# Altium PCB HBridge.PcbDoc
Units mil, origin at the board's own origin, x right, y up, seen from the top; angles counter-clockwise.
Board outline 2143 x 2841 mil, 4 copper layers (Top Layer, 12V, GND, Bottom Layer), stack 30.634 mil thick; 50 components, 77 nets, 268 pads, 78 vias.
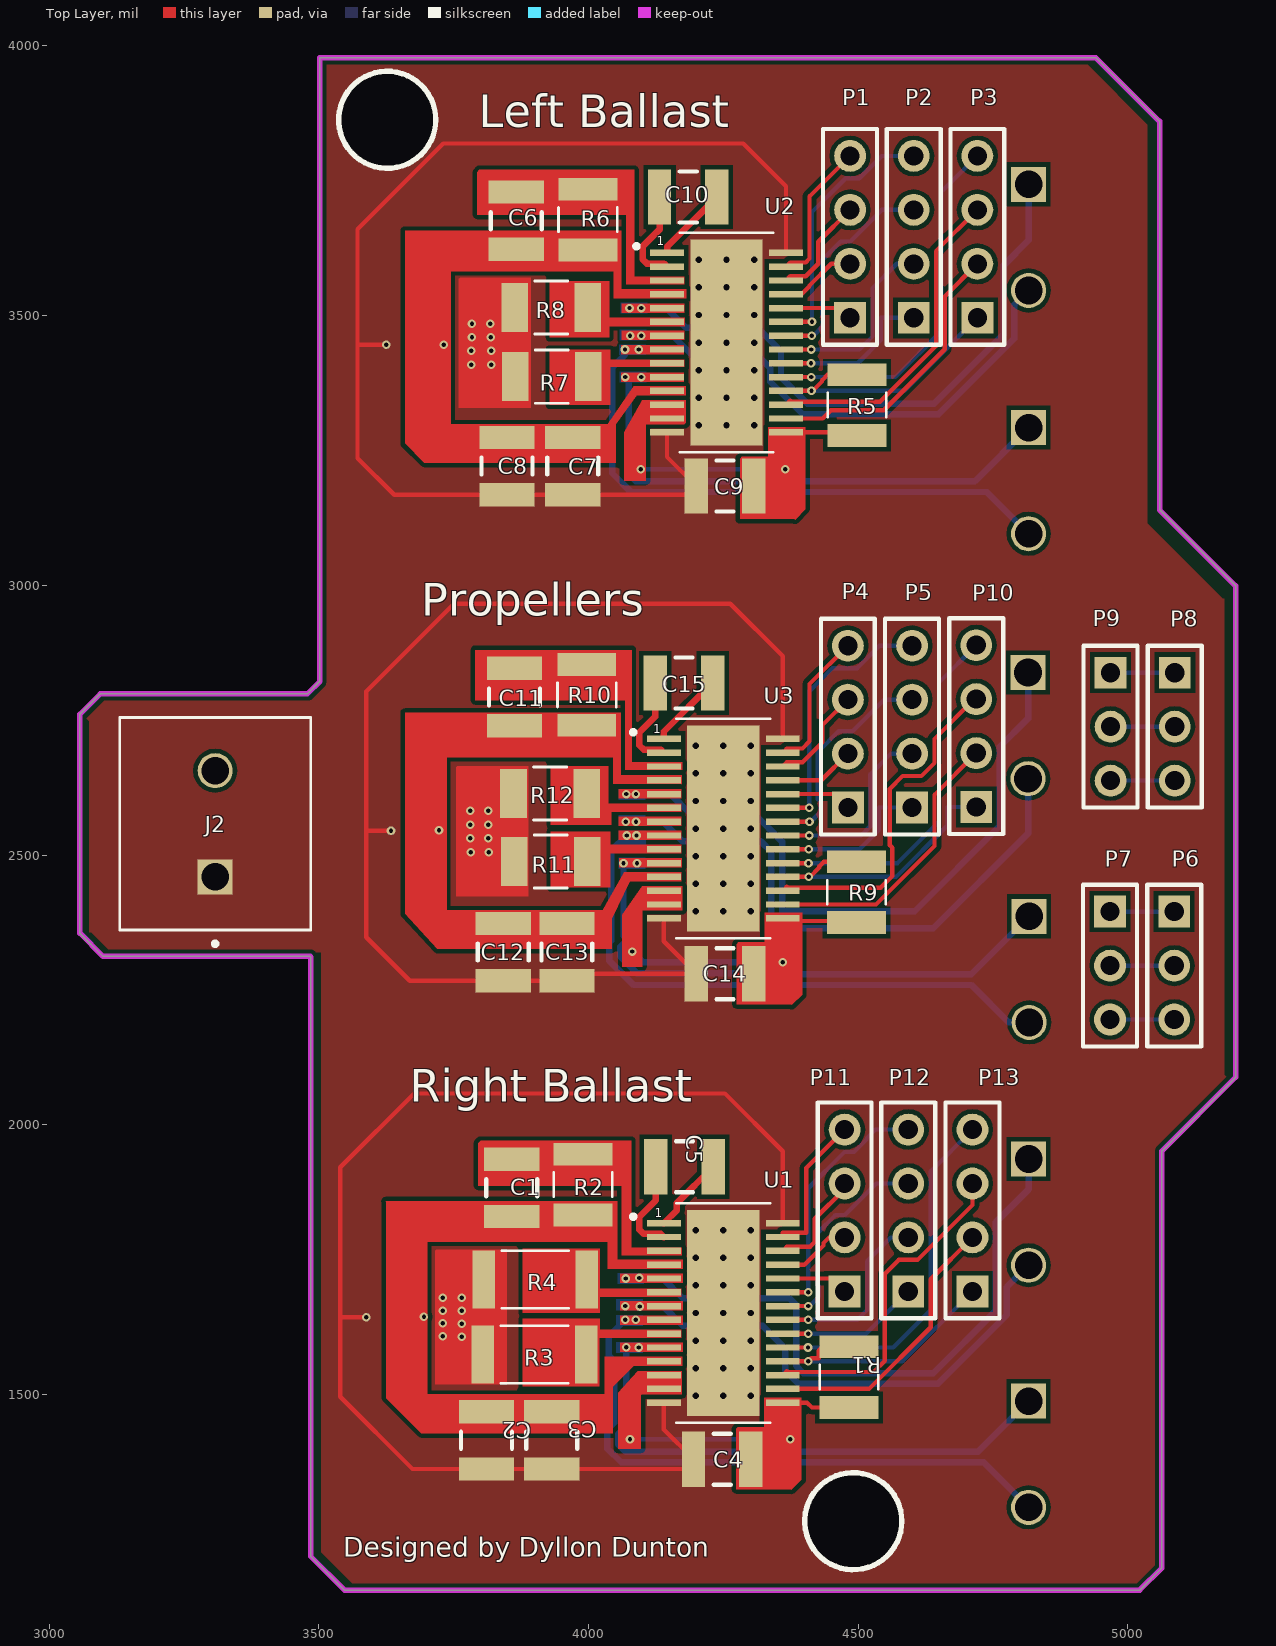
[diagram p0: Top Layer view]
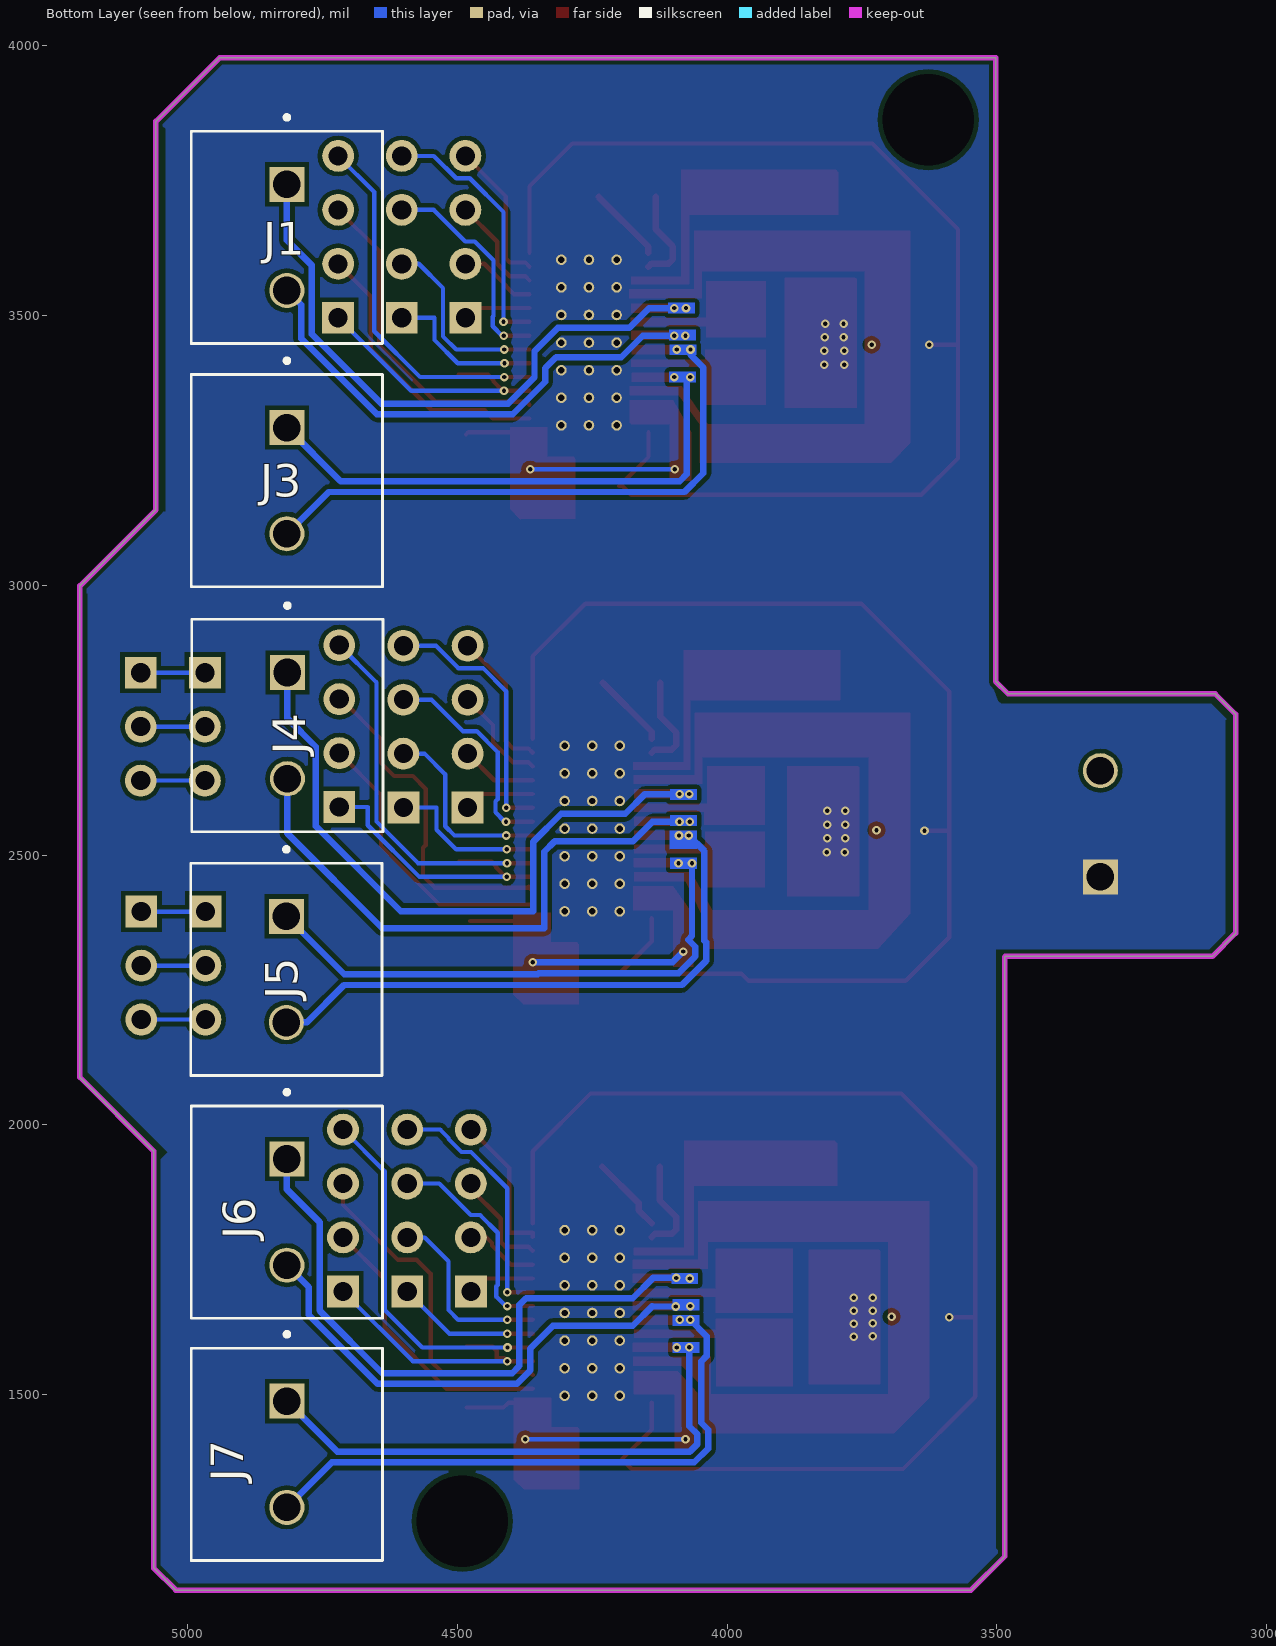
[diagram p1: Bottom Layer view, seen from below]
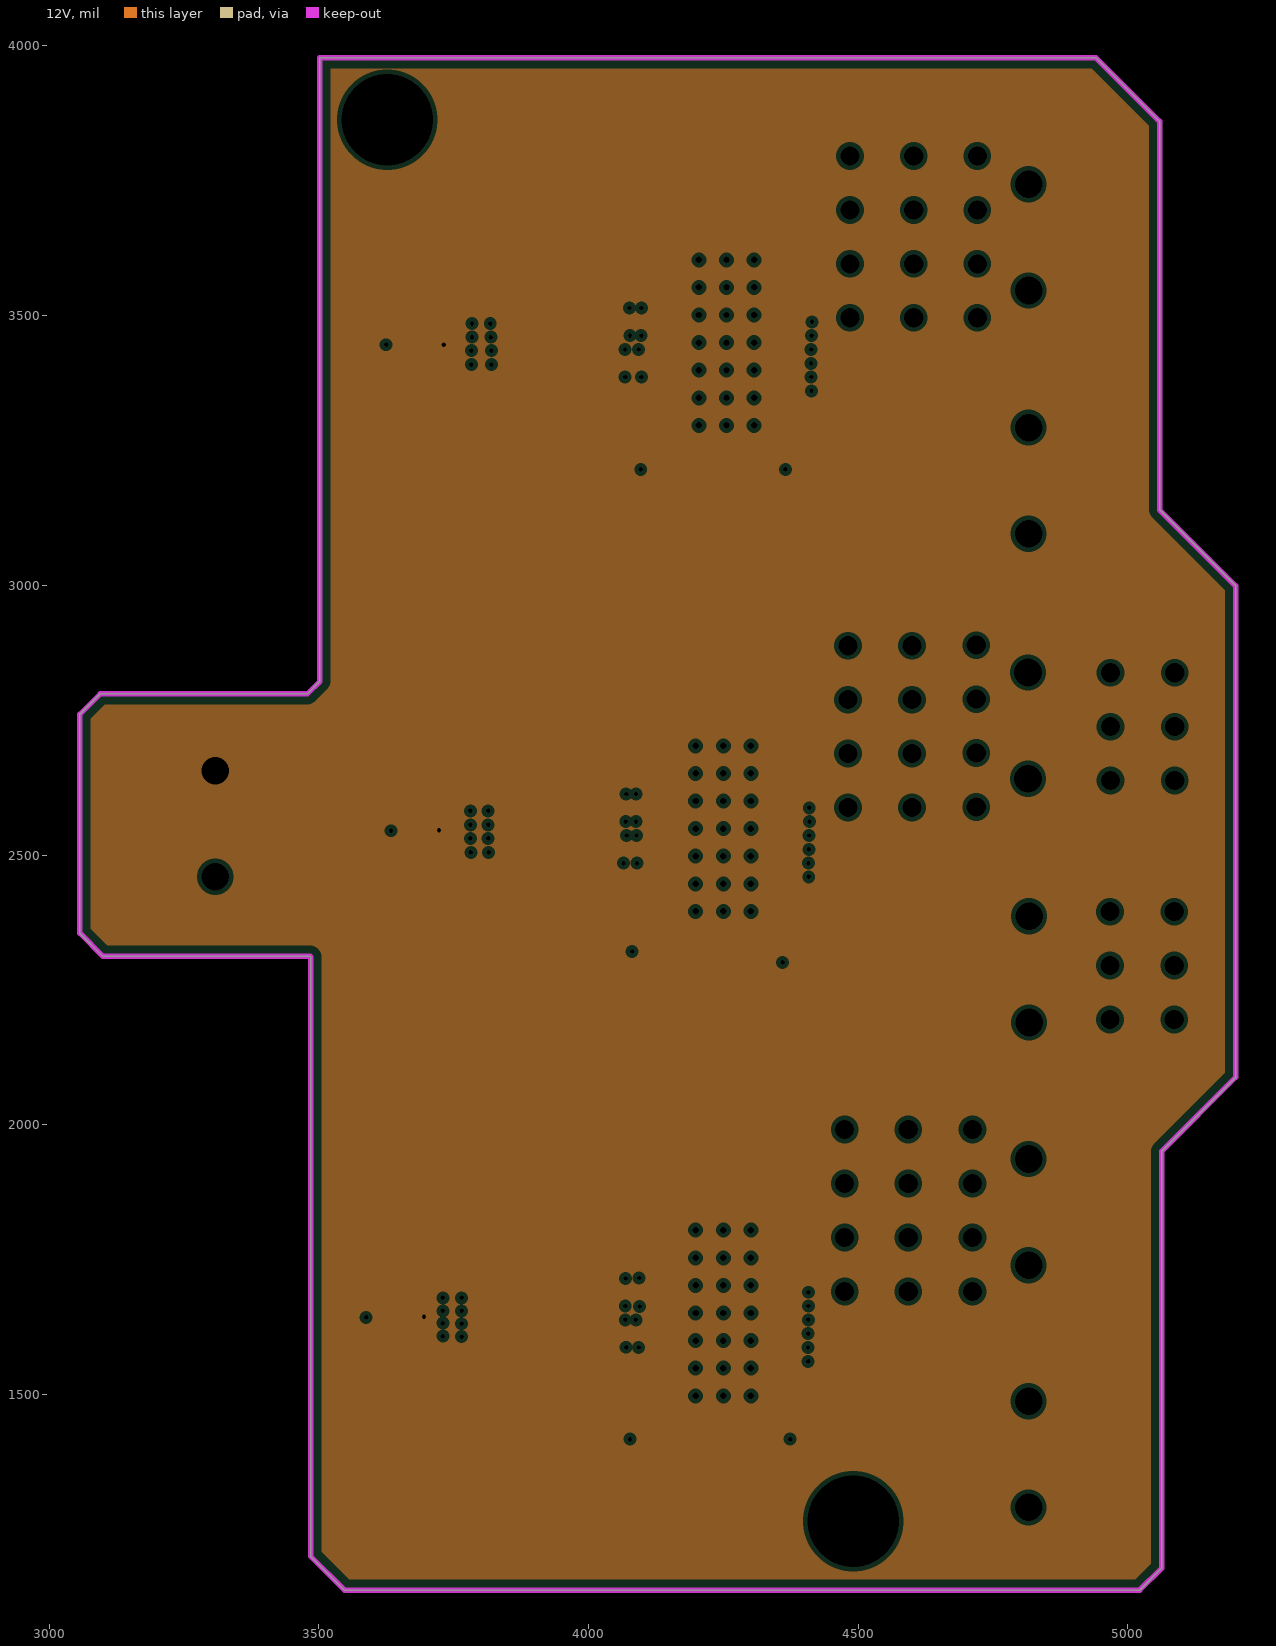
[diagram p2: 12V, clearances drawn from the general rule]
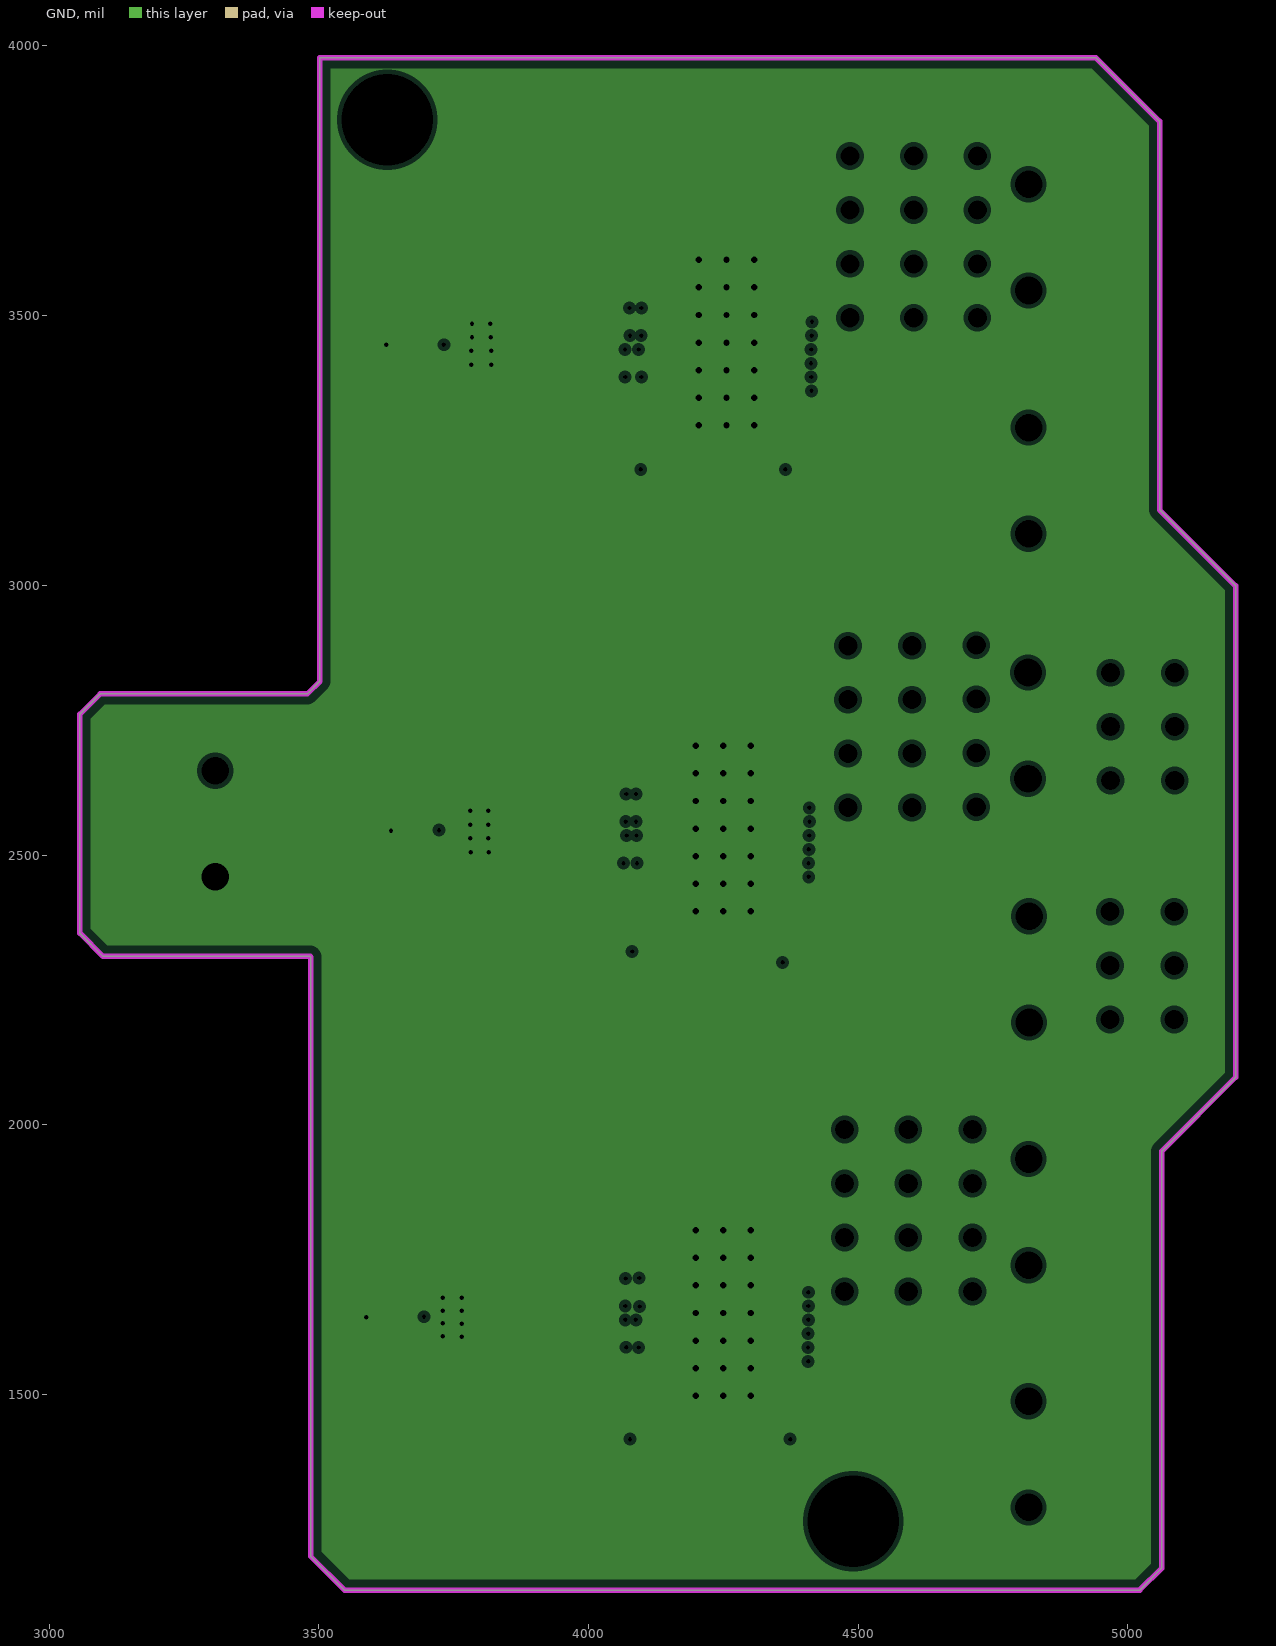
[diagram p3: GND, clearances drawn from the general rule]

## Layer stack, top to bottom
Top Solder: solder mask 0.4, Solder Resist, Dk 3.5
Top Layer: signal copper 1.4
Dielectric 1: core 10, FR-4, Dk 4.2
12V: plane copper 1.417
Dielectric 3: prepreg 5, Dk 4.2
GND: plane copper 1.417
Dielectric 2: core 10, Dk 4.2
Bottom Layer: signal copper 1.4
Bottom Solder: solder mask 0.4, Solder Resist, Dk 3.5

## Board outline
3485,1200 3548,1137 5022,1137 5063,1178 5063,1951 5200,2088 5200,2999 5059,3140 5059,3860 4941,3978 3502,3978 3502,2822 3479,2799 3095,2799 3057,2761 3057,2355 3100,2312 3484,2312 3485,2311

## Design rules (kind name [scope] priority, off if disabled: settings)
Clearance [All] p1: gap=8
HoleSize [All] p1: absolutevalues=TRUE maxlimit=170 minlimit=1 maxpercent=80.000 minpercent=20.000
MinimumSolderMaskSliver [All] p1 off: minsoldermaskwidth=10
PlaneClearance [All] p1: clearance=8
PlaneConnect [All] p1: planeconnectstyle=Direct reliefexpansion=20 reliefentries=4 reliefconductorwidth=10 reliefairgap=10
PolygonConnect [All] p1: connectstyle=Direct reliefconductorwidth=10 reliefentries=4 polygonreliefangle="90 Angle" airgapwidth=10
RoutingVias [All] p1: holewidth=8 width=16 viastyle="Through Hole" minholewidth=8 minwidth=16 maxholewidth=8 maxwidth=16
SilkToBoardRegionClearance [All] p1 off:
SilkToSilkClearance [All] p1 off: silktosilkclearance=10
SilkToSolderMaskClearance [IsPad] p1 off: minsilkscreentomaskgap=10 clearancetoexposedcopper=TRUE
SolderMaskExpansion [All] p1: expansion=4
Width [All] p1: maxlimit=12 minlimit=8 preferedwidth=12
23 further rules are at their usual default settings.

## Classes and differential pairs
component class "Dual H-Bridge Stepper Right": C11 C12 C13 C14 C15 R9 R10 R11 R12 U3
component class "Dual H-Bridge Stepper Left": C6 C7 C8 C9 C10 R5 R6 R7 R8 U2
component class "Dual H-Bridge Propeller": C1 C2 C3 C4 C5 R1 R2 R3 R4 U1
component class HBridge: J1 J2 J3 J4 J5 J6 J7 P1 P2 P3 P4 P5 P6 P7 P8 P9 P10 P11 P12 P13

## Components (designator, comment, footprint, x,y, rotation, side; value= is the part's Value field where it differs from the comment)
C1 "Cap" C1210 3858,1883 r270 top
C2 "Cap" C1210 3811,1415 r90 top
C3 "Cap" C1210 3932,1415 r270 top
C4 "Cap" C1210 4248,1380 r0 top
C5 "Cap" C1210 4178,1922 r0 top
C6 "Cap" C1210 3866,3676 r270 top
C7 "Cap" C1210 3971,3221 r90 top
C8 "Cap" C1210 3849,3221 r270 top
C9 "Cap" C1210 4253,3184 r0 top
C10 "Cap" C1210 4185,3720 r0 top
C11 "Cap" C1210 3863,2793 r270 top
C12 "Cap" C1210 3842,2320 r90 top
C13 "Cap" C1210 3960,2320 r270 top
C14 "Cap" C1210 4253,2280 r0 top
C15 "Cap" C1210 4177,2819 r0 top
J1 "StepperLeft A" PHOENIX_1935776 4816,3645 r90 bottom
J2 "Power Input" PHOENIX_1935776 3308,2558 r270 top
J3 "StepperLeft B" PHOENIX_1935776 4816,3194 r90 bottom
J4 "StepperRight A" PHOENIX_1935776 4815,2740 r90 bottom
J5 "StepperRight B" PHOENIX_1935776 4817,2288 r90 bottom
J6 "Prop A" PHOENIX_1935776 4816,1838 r90 bottom
J7 "Prop B" PHOENIX_1935776 4816,1389 r90 bottom
P1 "PWM Left Stepper" HDR1X4 4485,3496 r90 top
P2 "Control Left Stepper" HDR1X4 4603,3496 r90 top
P3 "Setters Left Stepper" HDR1X4 4721,3496 r90 top
P4 "PWM Right Stepper" HDR1X4 4481,2588 r90 top
P5 "Control Right Stepper" HDR1X4 4600,2588 r90 top
P6 "Header 3" HDR1X3 5086,2395 r270 top
P7 "Header 3" HDR1X3 4967,2395 r270 top
P8 "Header 3" HDR1X3 5087,2838 r270 top
P9 "Header 3" HDR1X3 4968,2838 r270 top
P10 "Setters Right Stepper" HDR1X4 4719,2589 r90 top
P11 "PWM Props" HDR1X4 4475,1691 r90 top
P12 "Control Props" HDR1X4 4593,1691 r90 top
P13 "Setters Props" HDR1X4 4712,1691 r90 top
R1 "RC1210FR-07523RL" RESC3126X65N 4483,1532 r90 top
R2 "CRGP1210F1M0" RESC3126X65N 3990,1889 r90 top
R3 "Res1" RESC5025X70N 3900,1574 r0 top
R4 "Res1" RESC5025X70N 3901.41,1713 r0 top
R5 "RC1210FR-07523RL" RESC3126X65N 4498,3334 r90 top
R6 "CRGP1210F1M0" RESC3126X65N 3999,3678 r90 top
R7 "Res1" RES_ERJ14RQJ1R0U 3932.09,3387 r0 top
R8 "Res1" RES_ERJ14RQJ1R0U 3931.09,3515 r0 top
R9 "RC1210FR-07523RL" RESC3126X65N 4497,2431 r90 top
R10 "CRGP1210F1M0" RESC3126X65N 3997,2797 r90 top
R11 "Res1" RES_ERJ14RQJ1R0U 3930,2488 r0 top
R12 "Res1" RES_ERJ14RQJ1R0U 3929,2614 r0 top
U1 "DRV8841PWP" IC_TPS61196PWPRQ1 4250,1651 r0 top
U2 "DRV8841PWP" IC_TPS61196PWPRQ1 4256,3450 r0 top
U3 "DRV8841PWP" IC_TPS61196PWPRQ1 4250,2549 r0 top

## Footprints (in the part's own frame and the unit in brackets; to place one, negate y for a bottom-side part, rotate by r counter-clockwise, add the part's x,y. Pads: shape width x height; smd on the part's side, far side on the other; paste and mask are expansions set on the pad)
C1210 [mm] "Chip Capacitor, Body 3.2x2.5mm, IPC High Density"
  rect 1.1x2.6 smd: 1(-1.35,0) 2(1.35,0)
  silkscreen extent -0.4,-1.2 0.4,1.2, body extent -1.7,-1.35 1.7,1.35, height 1.3
HDR1X3 [mm] "Connector; Header; 3 Position"
  rect 1.5x1.5 hole 0.9: 1(0,0)
  round 1.5 hole 0.9: 2(2.54,0) 3(5.08,0)
  silkscreen extent -1.27,-1.27 6.35,1.27
HDR1X4 [mm] "Connector; Header; 4 Position"
  rect 1.5x1.5 hole 0.9: 1(0,0)
  round 1.5 hole 0.9: 2(2.54,0) 3(5.08,0) 4(7.62,0)
  silkscreen extent -1.27,-1.27 8.89,1.27
IC_TPS61196PWPRQ1 [mm]
  rect 1.6x0.3 smd paste-0.025 mask+0.07: 1(-2.8,4.225) 2(-2.8,3.575) 3(-2.8,2.925) 4(-2.8,2.275) 5(-2.8,1.625) 6(-2.8,0.975) 7(-2.8,0.325) 8(-2.8,-0.325) 9(-2.8,-0.975) 10(-2.8,-1.625) 11(-2.8,-2.275) 12(-2.8,-2.925) 13(-2.8,-3.575) 14(-2.8,-4.225) 15(2.8,-4.225) 16(2.8,-3.575) 17(2.8,-2.925) 18(2.8,-2.275) 19(2.8,-1.625) 20(2.8,-0.975) 21(2.8,-0.325) 22(2.8,0.325) 23(2.8,0.975) 24(2.8,1.625) 25(2.8,2.275) 26(2.8,2.925) 27(2.8,3.575) 28(2.8,4.225)
  rect 3.4x9.7 smd paste-6 mask+0: 29(0,0)
  round 0.5 hole 0.3 mask+0: 30(0,0) 31(0,1.3) 32(0,2.6) 33(0,3.9) 34(0,-1.3) 35(0,-2.6) 36(0,-3.9) 37(-1.3,3.9) 38(1.3,3.9) 39(-1.3,2.6) 40(1.3,2.6) 41(1.3,1.3) 42(-1.3,1.3) 43(-1.3,0) 44(1.3,0) 45(-1.3,-1.3) 46(1.3,-1.3) 47(-1.3,-2.6) 48(1.3,-2.6) 49(-1.3,-3.9) 50(1.3,-3.9)
  silkscreen extent -4.34,-5.17 2.2,5.17, body extent -3.2,-4.85 3.2,4.85, height 1.2
PHOENIX_1935776 [mm]
  rect 1.65x1.65 / inner round 1.65 / far side rect 1.65x1.65 hole 1.3: 01(2.5,0)
  round 1.65 hole 1.3: 02(-2.5,0)
  silkscreen extent -5,-4.5 5.75,4.5
RES_ERJ14RQJ1R0U [mm]
  rect 1.25x2.3 smd: 1(-1.725,0) 2(1.725,0)
  silkscreen extent -0.78,-1.25 0.78,1.25, body extent -1.6,-1.25 1.6,1.25, height 0.6
RESC3126X65N [mm]
  rect 1.07x2.77 smd: 1(-1.43,0) 2(1.43,0)
  silkscreen extent -0.57,-1.38 0.57,1.38
RESC5025X70N [mm]
  rect 1.06x2.72 smd: 1(-2.428,0) 2(2.428,0)
  silkscreen extent -1.58,-1.35 1.58,1.35

## Part data
C1 C2 C3 C4 C5 C6 C7 C8 C9 C10 C11 C12 C13 C14 C15: "Capacitor"
J1 J2 J3 J4 J5 J6 J7: library part 1935776
P1 P2 P3 P4 P5 P10 P11 P12 P13: library part "Header 4", "Header, 4-Pin"
P6 P7 P8 P9: "Header, 3-Pin"
R1 R5 R9: "523 Ohms ±1% 0.5W, 1/2W Chip Resistor 1210 _3225 Metric_ Moisture Resistant Thick Film"
R2 R6 R10: library part RC1210FR-07523RL, "523 Ohms ±1% 0.5W, 1/2W Chip Resistor 1210 _3225 Metric_ Moisture Resistant Thick Film"
R3 R4 R7 R8 R11 R12: "Resistor"
U1 U2 U3: "45-V, 2.5-A bipolar stepper or dual H-bridge motor driver IC with current regulation and PWM control"

## Free pads (board coordinates)
  round 100 hole 170 unplated: 0(3627,3863) 0(4491,1265)

## Via types
v1: diameter 16, hole 8, Top Layer to Bottom Layer, 78 vias

## Nets (pads, with @x,y where several pads share a name; then routed paths per layer and width w, separated by ;. In a path a pad name is that pad's centre, name@x,y a point inside that pad or via, vN(x,y) a via of type N, cw(c..) or ccw(c..) an arc to the next point about the centre after c; other vN are vias at no path point)
12V: C1.2 C2.2 C3.1 C6.2 C7.2 C8.1 C11.2 C12.2 C13.1 J2.02 R2.1 R6.1 R10.1 U1.4 U1.11 U2.4 U2.11 U3.4 U3.11 | length 2492.9
  Top Layer w8: 3681,3352 3681,3446 ; v1(3723,2546) 3684.3,2546 ; v1(3732,3446) 3681,3446 ; 3758.85,3274.15 C8.1 C7.2 C7.2@3985,3274.15 ; C2.2 C3.1 C3.1@3981.12,1468.15 ; C1.2 R2.1@4004.53,1829.85 ; R2.1 4042.3,1832.7 4048.43,1826.57 4048.43,1740.57 U1.4 ; R10.1@3997,2739.85 C11.2 3749.85,2739.85 3684.3,2674.3 3684.3,2546 ; R6.1 3997.85,3622.85 C6.2 3744.85,3622.85 3681,3559 3681,3446 ; C13.1@4001.15,2373.15 C13.1 C12.2 3708.15,2373.15 3684.3,2397 3684.3,2546 ; 4066.43,2638.57 U3.4 ; 4087.43,2459.43 U3.11 ; U2.4@4145.33,3540 U2.4
  other v1: 3695,1644
GND: C2.1 C3.2 C4.1 C7.1 C8.2 C9.1 C12.1 C13.2 C14.1 J2.01 R3.1 R4.1 R7.1 R8.1 R11.1 R12.1 U1.14 U1.28 U1.29 U1.30 U1.31 U1.32 U1.33 U1.34 U1.35 U1.36 U1.37 U1.38 U1.39 U1.40 U1.41 U1.42 U1.43 U1.44 U1.45 U1.46 U1.47 U1.48 U1.49 U1.50 U2.14 U2.28 U2.29 U2.30 U2.31 U2.32 U2.33 U2.34 U2.35 U2.36 U2.37 U2.38 U2.39 U2.40 U2.41 U2.42 U2.43 U2.44 U2.45 U2.46 U2.47 U2.48 U2.49 U2.50 U3.14 U3.28 U3.29 U3.30 U3.31 U3.32 U3.33 U3.34 U3.35 U3.36 U3.37 U3.38 U3.39 U3.40 U3.41 U3.42 U3.43 U3.44 U3.45 U3.46 U3.47 U3.48 U3.49 U3.50 | length 8122.5
  Top Layer w8: v1(3588,1643) 3540,1643 ; v1(3625,3446) 3572,3446 ; v1(3634,2545) 3588,2545 ; v1(3730,1608) 3746,1608 3746,1622 ; v1(3730,1632) 3746,1632 3746,1646 ; v1(3730,1655) 3746,1655 ; v1(3730,1679) 3746,1679 ; 3746,1669 3746,1655 ; v1(3765,1607) 3746,1607 ; v1(3765,1631) 3746,1631 ; v1(3765,1655) 3746,1655 ; v1(3765,1679) 3746,1679 ; v1(3781,2531) v1(3814,2531) ; v1(3781,2556) v1(3814,2556) ; v1(3781,2582) 3800,2582 ; v1(3782,2505) v1(3815,2505) ; v1(3783,3409) 3801,3409 ; v1(3783,3435) 3801,3435 ; v1(3784,3460) 3802,3460 ; v1(3784,3485) 3802,3485 ; 3803,3460 v1(3819,3460) ; 3804,3409 v1(3820,3409) ; 3804,3435 v1(3820,3435) ; R3.1@3805.82,1574 3763,1574 3746,1591 3746,1607 ; R4.1 3766,1713 3746,1693 3746,1679 ; v1(3814,2582) 3800,2582 ; v1(3818,3485) 3802,3485 ; R12.1 3812,2614 3800,2602 3800,2582 ; R11.1 3813,2488 3800,2501 3800,2582 ; R8.1 3820,3515 3802,3497 3802,3485 ; R7.1 3810,3387 3802,3395 3802,3485 ; U1.14 4139.76,1435.09 C4.1 4176.7,1361.85 C3.2 C2.1 3673.85,1361.85 3540,1495.7 3540,1643 ; U3.14 4139.76,2340.09 C14.1 3973.15,2280 C13.2 C12.1 3668.85,2266.85 3588,2347.7 3588,2545 ; U2.14 4145.76,3238.09 C9.1 4194,3184 4177.85,3167.85 C7.1 C8.2 3639.85,3167.85 3572,3235.7 3572,3446 ; U1.28 4360.24,1950.76 4253,2058 3677,2058 3540,1921 3540,1643 ; U3.28 4360.24,2868.76 4263,2966 3751,2966 3588,2803 3588,2545 ; U2.28 4366.24,3739.76 4287,3819 3731,3819 3572,3660 3572,3446 ; 3746,1607 3746,1631 ; 3746,1631 3746,1655 ; 3746,1655 3746,1679
NetC1_1: 
NetC4_2: C4.2 R1.1 U1.12 U1.13 U1.15 | length 606
  Top Layer w8: U1.13 U1.12 ; C4.2 4360.24,1439.09 ; v1(4374,1417) 4374,1425.32 4360.24,1439.09 ; R1.1 4414.3,1475.7 4405.34,1484.66 U1.15 4360.24,1439.09
  Bottom Layer w8: v1(4077,1417) v1(4374,1417)
NetC5_1: C5.1 U1.2 | length 180.3
  Top Layer w12: C5.1 4124.85,1859.63 4094.27,1829.04 4094.27,1805.63 4102.47,1797.43 4134.08,1797.43 U1.2
NetC5_2: C5.2 U1.1 | length 142.5
  Top Layer w12: U1.1 4164,1841.57 4164,1854.85 C5.2
NetC6_1: 
NetC9_2: C9.2 R5.1 U2.12 U2.13 U2.15 | length 598.9
  Top Layer w8: 4112.25,3309.25 U2.13 U2.12 ; C9.2 4365,3242.85 ; v1(4365,3215) 4365,3242.85 ; R5.1@4484,3279.7 4480.04,3283.66 U2.15 4366.24,3244.09 4365,3242.85
  Bottom Layer w8: v1(4097,3215) v1(4365,3215)
NetC10_1: C10.1 U2.2 | length 179.7
  Top Layer w12: C10.1 4131.85,3659.63 4100.27,3628.04 4100.27,3604.63 4108.47,3596.43 4140.08,3596.43 U2.2
NetC10_2: C10.2 U2.1 | length 141.9
  Top Layer w12: U2.1 4145.76,3627.61 C10.2
NetC11_1: 
NetC14_2: C14.2 R9.1 U3.12 U3.13 U3.15 | length 626.1
  Top Layer w8: 4102.25,2408.25 U3.13 U3.12 ; C14.2 4360,2333.85 ; v1(4360,2301) 4360,2333.85 ; R9.1@4476,2377.7 4365.2,2377.7 U3.15 4360.24,2334.09 4360,2333.85
  Bottom Layer w12: v1(4081,2321) 4101,2301 v1(4360,2301)
NetC15_1: C15.1 U3.2 | length 178.9
  Top Layer w12: C15.1 4123.85,2756.63 4094.27,2727.04 4094.27,2703.63 4102.47,2695.43 4134.08,2695.43 U3.2
NetC15_2: C15.2 U3.1 | length 141.1
  Top Layer w12: U3.1 4139.76,2728.61 C15.2
NetJ1_01: J1.01 U2.5 | length 1193.1
  Top Layer w8: v1(4076.02,3513.98) v1(4098.02,3513.98) U2.5
  Bottom Layer w12: v1(4098.02,3513.98) 4144.34,3513.98 4180.98,3477.34 4313.56,3477.34 4357,3433.9 4357,3385.75 4405.75,3337 4640.85,3337 4769.52,3465.67 4769.52,3593.06 4816,3639.54 J1.01
NetJ1_02: J1.02 U2.7 | length 993.8
  Top Layer w8: v1(4077.2,3462.8) v1(4097.8,3462.8) U2.7
  Bottom Layer w12: v1(4097.8,3462.8) 4156.2,3462.8 4196.34,3422.66 4317.06,3422.66 4337,3402.72 4337,3377.47 4397.47,3317 4649.14,3317 4789.52,3457.38 4789.52,3520.09 J1.02
NetJ3_01: J3.01 U2.10 | length 1048.3
  Top Layer w8: v1(4068.02,3386.02) v1(4098.02,3386.02) U2.10
  Bottom Layer w12: v1(4068.02,3386.02) 4075,3379.05 4075,3205.89 4087.89,3193 4716.57,3193 J3.01
NetJ3_02: J3.02 U2.8 | length 1135.6
  Top Layer w8: v1(4067.8,3437.2) v1(4093.2,3437.2) U2.8
  Bottom Layer w12: v1(4067.8,3437.2) 4067.8,3427.62 4044,3403.82 4044,3208 4079,3173 4738.57,3173 J3.02
NetJ4_01: J4.01 U3.5 | length 1281.5
  Top Layer w8: v1(4088.02,2612.98) U3.5
  Bottom Layer w12: v1(4069.98,2612.98) v1(4088.02,2612.98) 4152.31,2612.98 4188.94,2576.34 4307.56,2576.34 4359,2524.9 4359,2396 4604.85,2396 4762.53,2553.67 4762.53,2700.53 4815,2753 J4.01
NetJ4_02: J4.02 U3.7 | length 1136.9
  Top Layer w8: v1(4069.2,2561.8) v1(4088.2,2561.8) U3.7
  Bottom Layer w12: v1(4088.2,2561.8) 4138.34,2561.8 4174.98,2525.16 4319.84,2525.16 4339,2506 4339,2364 4639,2364 4815,2540 J4.02
NetJ5_01: J5.01 U3.10 | length 1072.3
  Top Layer w8: v1(4065,2485) v1(4089.98,2485.02) ; v1(4089.98,2485.02) U3.10
  Bottom Layer w12: v1(4065,2485) 4065,2350.16 4072.02,2343.14 4059,2330.11 4059,2311.89 4089.89,2281 4348.89,2281 4350.89,2279 4709.57,2279 J5.01
NetJ5_02: J5.02 U3.8 | length 1140
  Top Layer w8: v1(4070.8,2536.2) v1(4089.2,2536.2) U3.8
  Bottom Layer w12: v1(4070.8,2536.2) 4042,2507.41 4042,2341.4 4039,2338.4 4039,2303.6 4083.6,2259 4710,2259 4779.43,2189.57 J5.02
NetJ6_01: J6.01 U1.5 | length 1225.7
  Top Layer w8: v1(4069.02,1714.98) 4086.02,1714.98 U1.5
  Bottom Layer w12: v1(4094,1716) 4137.31,1716 4174.98,1678.34 4372.66,1678.34 4385.02,1665.98 4385.02,1552.73 4398.32,1539.43 4639.29,1539.43 4755.53,1655.67 4755.53,1819.53 4816,1880 J6.01
NetJ6_02: J6.02 U1.7 | length 997.9
  Top Layer w8: v1(4068.2,1663.8) 4086.8,1663.8 U1.7
  Bottom Layer w12: v1(4095,1663) 4137.54,1663 4138.34,1663.8 4174.98,1627.16 4322.84,1627.16 4365.02,1584.98 4365.02,1544.45 4390.04,1519.43 4647.57,1519.43 4775.53,1647.39 4775.53,1699.1 J6.02
NetJ7_01: J7.01 U1.10 | length 1061.2
  Top Layer w8: v1(4070,1587.5) 4070.48,1587.02 4087.98,1587.02 U1.10
  Bottom Layer w12: v1(4070,1587.5) 4070,1441.11 4055,1426.11 4055,1407.89 4068.89,1394 4722.57,1394 J7.01
  other v1: 4093,1587.02
NetJ7_02: J7.02 U1.8 | length 1158.4
  Top Layer w8: v1(4068.2,1638.2) v1(4087.8,1638.2) U1.8
  Bottom Layer w12: v1(4068.2,1638.2) 4038,1608 4038,1571.2 4048,1561.2 4048,1447.4 4035,1434.4 4035,1399.6 4060.6,1374 4732.57,1374 J7.02
NetP1_1: P1.1 U2.24 | length 126.2
  Top Layer w8: U2.24 4467.02,3513.98 P1.1
NetP1_2: P1.2 U2.25 | length 143
  Top Layer w8: U2.25 4395.02,3539.57 4409.73,3554.28 4409.73,3555.73 4450,3596 P1.2
NetP1_3: P1.3 U2.26 | length 196.9
  Top Layer w8: U2.26 4373.92,3572.84 4402.7,3572.84 4426,3596.14 4426,3637 P1.3
NetP1_4: P1.4 U2.27 | length 271.3
  Top Layer w8: U2.27 4373.92,3598.43 4402.7,3598.43 4410,3605.73 4410,3721 P1.4
NetP2_1: P2.1 U2.20 | length 295.8
  Top Layer w8: U2.20 v1(4412.61,3411.61)
  Bottom Layer w8: v1(4412.61,3411.61) 4499.27,3411.61 4542.53,3454.87 4542.53,3496 P2.1
NetP2_2: P2.2 U2.21 | length 354.9
  Top Layer w8: U2.21 v1(4412.8,3437.2)
  Bottom Layer w8: v1(4412.8,3437.2) 4502.23,3437.2 4526.53,3461.5 4526.53,3550.94 4571.59,3596 P2.2
NetP2_3: P2.3 U2.22 | length 407.2
  Top Layer w8: U2.22 v1(4413.8,3462.8)
  Bottom Layer w8: v1(4413.8,3462.8) 4417.08,3462.8 4434.39,3480.1 4434.39,3498.06 4433,3499.44 4433,3602.73 4467.8,3637.53 4485.26,3637.53 4543.73,3696 P2.3
NetP2_4: P2.4 U2.23 | length 483.4
  Top Layer w8: U2.23 v1(4414.39,3488.39)
  Bottom Layer w8: v1(4414.39,3488.39) 4414.39,3691.86 4477,3754.47 4502.2,3754.47 4543.73,3796 P2.4
NetP3_1: P3.1 R5.2 U2.18 | length 509.2
  Top Layer w8: U2.18 v1(4413.43,3360.43) 4415.67,3360.43 4432.98,3377.74 4432.98,3379.98 4443.3,3390.3 R5.2
  Bottom Layer w8: v1(4413.43,3360.43) 4585.43,3360.43 P3.1
NetP3_2: P3.2 U2.16 | length 530.9
  Top Layer w8: U2.16 4434.25,3309.25 4449.43,3324.43 4547.32,3324.43 4660.53,3437.64 4660.53,3535.53 P3.2
NetP3_3: P3.3 U2.17 | length 610
  Top Layer w8: U2.17 4373.92,3342.53 4373.92,3340.43 4540.69,3340.43 4644.53,3444.27 4644.53,3619.53 P3.3
NetP3_4: P3.4 U2.19 | length 675.7
  Top Layer w8: U2.19 v1(4412.98,3386.02)
  Bottom Layer w8: v1(4412.98,3386.02) 4569.05,3386.02 4654,3470.97 4654,3729 P3.4
NetP4_1: P4.1 U3.24 | length 131.1
  Top Layer w8: U3.24 4456.02,2612.98 P4.1
NetP4_2: P4.2 U3.25 | length 141.2
  Top Layer w8: U3.25 4431.57,2638.57 P4.2
NetP4_3: P4.3 U3.26 | length 190.7
  Top Layer w8: U3.26 4367.92,2671.84 4396.7,2671.84 4434,2709.14 4434,2741 P4.3
NetP4_4: P4.4 U3.27 | length 265.1
  Top Layer w8: U3.27 4367.92,2697.43 4396.7,2697.43 4410,2710.73 4410,2817 P4.4
NetP5_1: P5.1 U3.20 | length 295.9
  Top Layer w8: U3.20 v1(4408.61,2510.61)
  Bottom Layer w8: v1(4408.61,2510.61) 4502.27,2510.61 4538.53,2546.87 4538.53,2588 P5.1
NetP5_2: P5.2 U3.21 | length 358.9
  Top Layer w8: U3.21 v1(4409.2,2536.2)
  Bottom Layer w8: v1(4409.2,2536.2) 4505.23,2536.2 4522.53,2553.5 4522.53,2649.53 4561,2688 P5.2
NetP5_3: P5.3 U3.22 | length 404.7
  Top Layer w8: U3.22 v1(4409.8,2561.8)
  Bottom Layer w8: v1(4409.8,2561.8) 4412.08,2561.8 4429.39,2579.1 4429.39,2599.67 4425.39,2603.67 4425.39,2691.11 4463.8,2729.53 4489.53,2729.53 4548,2788 P5.3
NetP5_4: P5.4 U3.23 | length 490.8
  Top Layer w8: U3.23 v1(4409.39,2587.39)
  Bottom Layer w8: v1(4409.39,2587.39) 4409.39,2803.39 4452.47,2846.47 4498.2,2846.47 4539.73,2888 P5.4
NetP6_1: P6.1 P7.1 | length 119
  Bottom Layer w8: P7.1 P6.1
NetP6_2: P6.2 P7.2 | length 119
  Bottom Layer w8: P7.2 P6.2
NetP6_3: P6.3 P7.3 | length 119
  Bottom Layer w8: P7.3 P6.3
NetP8_1: P8.1 P9.1 | length 119
  Bottom Layer w8: P9.1 P8.1
NetP8_2: P8.2 P9.2 | length 119
  Bottom Layer w8: P9.2 P8.2
NetP8_3: P8.3 P9.3 | length 119
  Bottom Layer w8: P9.3 P8.3
NetP10_1: P10.1 R9.2 U3.18 | length 533.6
  Top Layer w8: U3.18 v1(4408.43,2459.43) 4410.67,2459.43 4427.98,2476.74 4427.98,2478.98 4436.3,2487.3 R9.2
  Bottom Layer w8: v1(4408.43,2459.43) 4570.09,2459.43 4666,2555.35 4666,2589 P10.1
NetP10_2: P10.2 U3.16 | length 530.6
  Top Layer w8: U3.16 4533.14,2408.25 4641.53,2516.64 4641.53,2611.53 P10.2
NetP10_3: P10.3 U3.17 | length 636.4
  Top Layer w8: U3.17 4367.92,2441.53 4367.92,2439.43 4541.69,2439.43 4563.53,2461.27 4563.53,2513.33 4558.47,2518.39 4558.47,2622.5 4582.45,2646.47 4617.2,2646.47 4641.53,2670.8 4641.53,2715.13 4715.39,2789 P10.3
NetP10_4: P10.4 U3.19 | length 677.2
  Top Layer w8: U3.19 v1(4407.98,2485.02)
  Bottom Layer w8: v1(4407.98,2485.02) 4573.05,2485.02 4650,2561.97 4650,2820 P10.4
NetP11_1: P11.1 U1.24 | length 124.7
  Top Layer w8: U1.24 4451.02,1714.98 P11.1
NetP11_2: P11.2 U1.25 | length 138.4
  Top Layer w8: U1.25 4400.33,1740.57 4435.73,1775.97 4435.73,1780.73 4446,1791 P11.2
NetP11_3: P11.3 U1.26 | length 197.6
  Top Layer w8: U1.26 4367.92,1773.84 4410.98,1773.84 4419.73,1782.6 4419.73,1825.65 4475,1880.92 P11.3
NetP11_4: P11.4 U1.27 | length 272.3
  Top Layer w8: U1.27 4360.24,1799.43 4403.73,1799.43 4403.73,1919.73 P11.4
NetP12_1: P12.1 U1.20 | length 265.2
  Top Layer w8: U1.20 v1(4407.39,1612.61)
  Bottom Layer w8: v1(4407.39,1612.61) 4514.61,1612.61 P12.1
NetP12_2: P12.2 U1.21 | length 349
  Top Layer w8: U1.21 v1(4407.8,1638.2)
  Bottom Layer w8: v1(4407.8,1638.2) 4498.23,1638.2 4516.53,1656.5 4516.53,1746.94 4560.59,1791 P12.2
NetP12_3: P12.3 U1.22 | length 400.1
  Top Layer w8: U1.22 v1(4407.8,1663.8)
  Bottom Layer w8: v1(4407.8,1663.8) 4410.31,1663.8 4427.61,1681.1 4427.61,1700.28 4425,1702.9 4425,1799.73 4457.8,1832.53 4475.26,1832.53 4533.73,1891 P12.3
NetP12_4: P12.4 U1.23 | length 471.7
  Top Layer w8: U1.23 v1(4407.61,1689.39)
  Bottom Layer w8: v1(4407.61,1689.39) 4407.61,1882.34 4474.74,1949.47 4492.2,1949.47 4516.53,1973.8 4516.53,1975.53 4532,1991 P12.4
NetP13_1: P13.1 R1.2 U1.18 | length 500.3
  Top Layer w8: U1.18 v1(4407.43,1561.43) 4413.02,1567.02 4427.02,1567.02 4427.02,1581.02 4434.3,1588.3 R1.2
  Bottom Layer w8: v1(4407.43,1561.43) 4582.43,1561.43 P13.1
NetP13_2: P13.2 U1.16 | length 520.1
  Top Layer w8: U1.16 4520.14,1510.25 4634.53,1624.64 4634.53,1713.53 P13.2
NetP13_3: P13.3 U1.17 | length 619.6
  Top Layer w8: U1.17 4367.92,1543.53 4367.92,1541.43 4528.69,1541.43 4549.53,1562.27 4549.53,1723.55 4575.45,1749.47 4610.2,1749.47 4712,1851.27 P13.3
NetP13_4: P13.4 U1.19 | length 669.7
  Top Layer w8: U1.19 v1(4407.02,1587.02)
  Bottom Layer w8: v1(4407.02,1587.02) 4565.05,1587.02 4634.53,1656.5 4634.53,1913.53 P13.4
NetR3_2: R3.2 U1.9 | length 1.8
  Top Layer w8: R3.2@3997,1574 R3.2@3997,1575.78
NetR4_2: R4.2 U1.6
NetR7_2: R7.2 U2.9
NetR8_2: R8.2 U2.6
NetR11_2: R11.2 U3.9 | length 13.1
  Top Layer w8: R11.2 R11.2@4011,2488
NetR12_2: R12.2 U3.6 | length 16.1
  Top Layer w8: R12.2 R12.2@4013,2614
VCP1: C6.1 R6.2 U2.3 | length 135.1
  Top Layer w8: C6.1 3993.85,3729.15 R6.2
VCP2: C1.1 R2.2 U1.3 | length 135.8
  Top Layer w8: C1.1 3980.85,1936.15 R2.2
VCP3: C11.1 R10.2 U3.3 | length 137
  Top Layer w8: C11.1 3989.85,2846.15 R10.2

## Polygon pours and split planes (outlines as drawn)
GND on Top Layer "Top Layer-Ground" (solid, remove dead copper, pour order 8): 3513,3970 3513,2814 3492,2793 3486,2787 3104,2787 3070,2753 3075,2748 3075,2357 3078,2357 3144,2291 3173,2320 3505,2320 3505,1207 3561,1151 3564,1148 5002,1148 5028,1148 5055,1175 5055,1956 5058,1956 5187,2085 5179,2093 5179,2975 5176,2975 5036,3115 5036,3843 5036,3854 4923,3967
GND on Bottom Layer "Top Layer-Ground" (solid, remove dead copper, pour order 10): 3508,3966 3510,3968 4925,3968 4943,3968 5053,3858 5041,3846 5041,3136 5045,3136 5191,2990 5185,2984 5185,2097 5037,1949 5057,1929 5057,1191 5057,1187 5015,1145 5011,1149 3560,1149 3544,1149 3490,1203 3502,1215 3502,2325 3110,2325 3108,2323 3076,2355 3076,2367 3076,2750 3074,2752 3102,2780 3106,2780 3492,2780 3498,2786 3510.03,2820 3510,2838
12V on 12V (split plane): 5038.9,3851.68 5038.9,3140 5039.29,3136.08 5040.43,3132.31 5042.29,3128.83 5044.79,3125.79 5179.9,2990.68 5179.9,2096.32 5048.79,1965.21 5046.29,1962.17 5044.43,1958.69 5043.29,1954.92 5042.9,1951 5042.9,1186.32 5013.68,1157.1 3556.32,1157.1 3505.1,1208.32 3505.1,2311 3504.71,2314.92 3503.57,2318.69 3501.71,2322.17 3499.21,2325.21 3498.21,2326.21 3495.17,2328.71 3491.69,2330.57 3487.92,2331.71 3484,2332.1 3108.32,2332.1 3077.1,2363.32 3077.1,2752.68 3103.32,2778.9 3479,2778.9 3482.92,2779.29 3486.69,2780.43 3490.17,2782.29 3493.21,2784.79 3516.21,2807.79 3518.71,2810.83 3520.57,2814.31 3521.71,2818.08 3522.1,2822 3522.1,3957.9 4932.68,3957.9
GND on GND (split plane): 5038.9,3851.68 5038.9,3140 5039.29,3136.08 5040.43,3132.31 5042.29,3128.83 5044.79,3125.79 5179.9,2990.68 5179.9,2096.32 5048.79,1965.21 5046.29,1962.17 5044.43,1958.69 5043.29,1954.92 5042.9,1951 5042.9,1186.32 5013.68,1157.1 3556.32,1157.1 3505.1,1208.32 3505.1,2311 3504.71,2314.92 3503.57,2318.69 3501.71,2322.17 3499.21,2325.21 3498.21,2326.21 3495.17,2328.71 3491.69,2330.57 3487.92,2331.71 3484,2332.1 3108.32,2332.1 3077.1,2363.32 3077.1,2752.68 3103.32,2778.9 3479,2778.9 3482.92,2779.29 3486.69,2780.43 3490.17,2782.29 3493.21,2784.79 3516.21,2807.79 3518.71,2810.83 3520.57,2814.31 3521.71,2818.08 3522.1,2822 3522.1,3957.9 4932.68,3957.9

## Keep-outs
Keep-Out Layer:
  the board outline again, w10

## Other copper
Top Layer:
  region net NetJ5_02: 4056,2545 4056,2528 4172,2528 4172,2545
  region net NetJ4_02: 4056,2571 4056,2554 4172,2554 4172,2571
  region net NetJ4_01: 4056,2622 4056,2605 4172,2605 4172,2622
  region net NetJ5_01: 4057,2494 4057,2477 4173,2477 4173,2494
  region net NetJ6_01: 4059,1724 4059,1707 4175,1707 4175,1724
  region net NetJ6_02: 4059,1673 4059,1656 4175,1656 4175,1673
  region net NetJ7_02: 4059,1646 4059,1629 4175,1629 4175,1646
  region net NetJ7_01: 4059,1596 4059,1579 4175,1579 4175,1596
  region net NetJ1_01: 4062,3522 4062,3505 4178,3505 4178,3522
  region net NetJ1_02: 4062,3472 4062,3455 4178,3455 4178,3472
  region net NetJ3_02: 4061,3445 4061,3428 4177,3428 4177,3445
  region net NetJ3_01: 4061,3394 4061,3377 4177,3377 4177,3394
  region net NetC9_2: 4180,3343 4180,3301 4178,3299 4106,3299 4106,3194 4066,3194 4066,3284 4100,3343
  region net NetC14_2: 4174,2442 4174,2400 4174,2398 4100,2398 4100,2293 4063,2293 4063,2389 4100,2442
  region net NetC4_2: 4173,1543 4173,1500 4099,1500 4097,1498 4097,1399 4055,1399 4055,1503 4091,1543
  region net NetC4_2: 4326,1494 4395,1494 4395,1342 4376,1323 4375,1324 4274,1324 4274,1436 4277,1439 4326,1439
  region net NetC14_2: 4327,2393 4396,2393 4396,2241 4377,2222 4376,2223 4275,2223 4275,2335 4278,2338 4327,2338
  region net NetC9_2: 4333,3293 4402,3293 4402,3141 4383,3122 4382,3123 4281,3123 4281,3235 4284,3238 4333,3238
  region net GND: 3888,2665 3888,2424 3755,2424 3755,2663 3757,2665
  region net GND: 3849,1768 3849,1519 3716,1519 3716,1766 3718,1768
  region net GND: 3893,3570 3893,3329 3760,3329 3760,3568 3762,3570
  region net VCP1: 4178,3558 4070,3558 4070,3687 3794,3687 3794,3766 3798,3770 4085,3770 4085,3572 4178,3572
  region net VCP3: 4174,2658 4068,2658 4068,2787 3790,2787 3790,2866 3790,2880 4080,2880 4080,2672 4174,2672
  region net VCP2: 4173,1758 4062,1758 4062,1887 3796,1887 3796,1966 3800,1970 4079,1970 4079,1772 4173,1772
  region net NetR3_2: 4172,1620 4021,1620 4021,1640 3878,1640 3878,1515 4020,1515 4020,1604 4021,1605 4172,1605
  region net NetR4_2: 4172,1696 4172,1681 4021,1681 4021,1651 3878,1651 3878,1770 4021,1770 4021,1696
  region net NetR12_2: 4172,2595 4172,2580 4042,2580 4042,2556 3930,2556 3930,2665 4037,2665 4037,2595
  region net NetR11_2: 4172,2519 4040,2519 4040,2543 4033,2543 3930,2543 3930,2440 4040,2440 4040,2503 4172,2503
  region net NetR8_2: 4179,3496 4179,3480 4039,3480 4039,3460 3928,3460 3928,3564 4039,3564 4039,3496
  region net NetR7_2: 4178,3418 4040,3418 4040,3437 3928,3437 3928,3335 4040,3335 4040,3405 4178,3405
  region net 12V: 4175,1733 4036,1733 4036,1783 3701,1783 3701,1500 4030,1500 4030,1570 4174,1570 4174,1553 4084,1553 4045,1514 4045,1428 3690,1428 3625,1493 3625,1857 3624,1858 4053,1858 4053,1750 4175,1750
  region net 12V: 4173,2631 4046,2632 4046,2681 3737,2681 3737,2398 4027,2398 4066,2468 4172,2468 4172,2451 4077,2451 4043,2382 4043,2326 3720,2326 3660,2391 3660,2752 3660,2764 4060,2764 4060,2648 4173,2648
  region net 12V: 4181,3532 4047,3532 4047,3582 3745,3582 3745,3299 4036,3299 4084,3369 4180,3369 4180,3352 4090,3352 4051,3299 4051,3227 3696,3227 3660,3263 3660,3627 3660,3657 4061,3657 4061,3549 4181,3549
Bottom Layer:
  region net NetJ5_02: 4056,2545.12 4078,2545.12 4106,2545.12 4106,2511 4105,2512 4056,2512
  region net NetJ4_02: 4056,2574 4105,2574 4105,2554 4104,2554 4056,2554
  region net NetJ4_01: 4056,2622 4105,2622 4105,2602 4104,2602 4056,2602
  region net NetJ5_01: 4056,2495 4105,2495 4105,2475 4104,2475 4056,2475
  region net NetJ3_01: 4058,3396 4107,3396 4107,3376 4106,3376 4058,3376
  region net NetJ3_02: 4057,3446 4106,3446 4106,3427 4105,3427 4057,3427
  region net NetJ1_02: 4058,3474 4107,3474 4107,3454 4106,3454 4058,3454
  region net NetJ1_01: 4060,3524 4109,3524 4109,3504 4108,3504 4060,3504
  region net NetJ6_01: 4054,1725 4103,1725 4103,1705 4102,1705 4054,1705
  region net NetJ6_02: 4052,1676 4101,1676 4101,1656 4100,1656 4052,1656
  region net NetJ7_02: 4052,1647 4101,1647 4101,1627 4100,1627 4052,1627
  region net NetJ7_01: 4052,1597 4101,1597 4101,1577 4100,1577 4052,1577

## Silkscreen, mask and mechanical layers (free items; w line width, h text height)
Top Overlay:
  circle w10: c4491,1265 r90
  circle w10: c3627,3863 r90
  text "Left Ballast" at 3797,3849 h60
  text "1" at 4127,3630 h16
  text "Propellers" at 3690,2944 h60
  text "1" at 4120,2726 h16
  text "Right Ballast" at 3669,2043 h60
  text "1" at 4123,1828 h16
  text "Designed by Dyllon Dunton" at 3545,1199 h36

## Dimensions
3502,3978 to 3485,1135 on Mechanical 1
3095,2799 to 3100,2312 on Mechanical 1
3485,1200 to 5063,1178 on Mechanical 1
5059,3140 to 5063,1951 on Mechanical 1
5200,2999 to 5200,2088 on Mechanical 1
3057,2761 to 3502,2822 on Mechanical 1